# EAGLE board SummerCart64 (EAGLE 9.6.2)
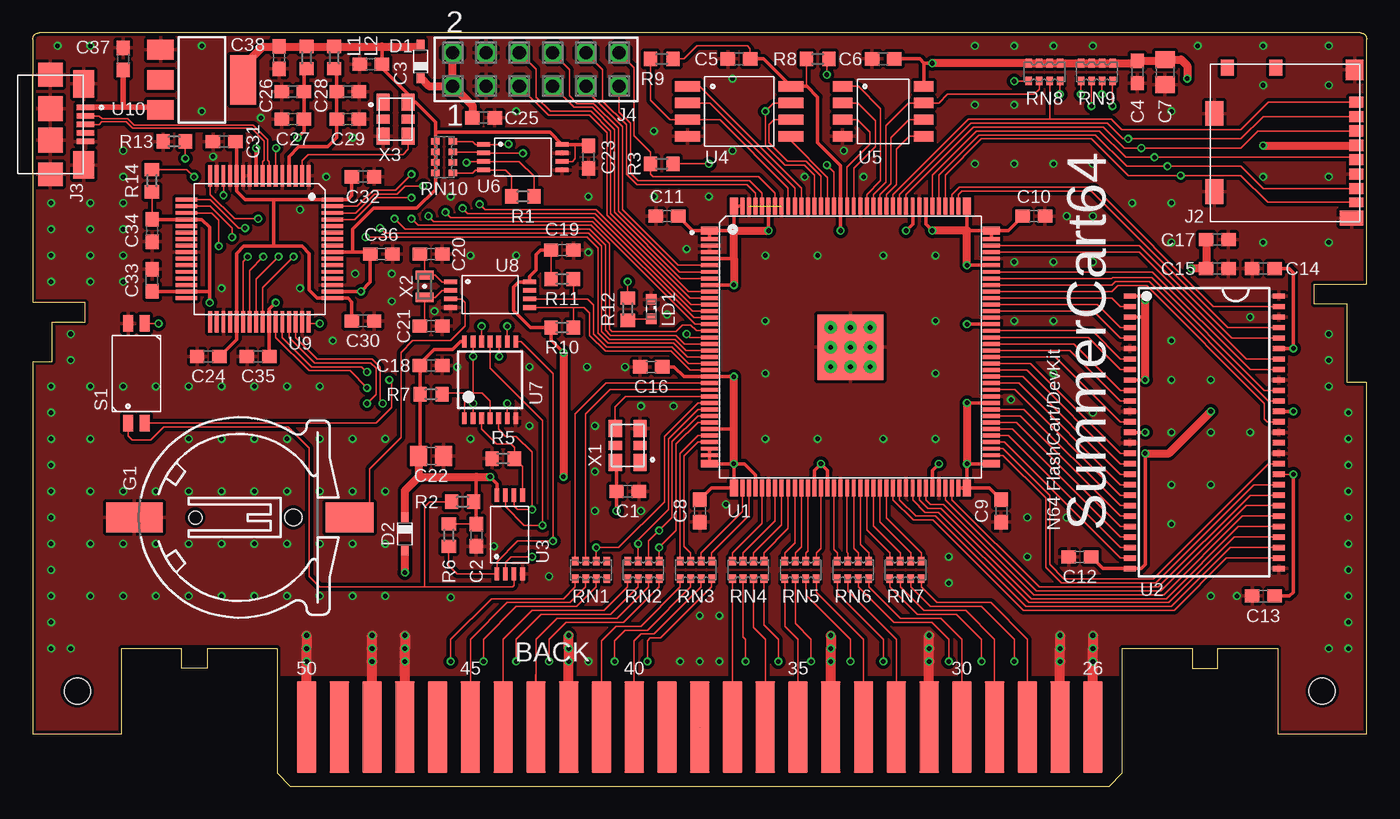
[diagram p0: board, top side]
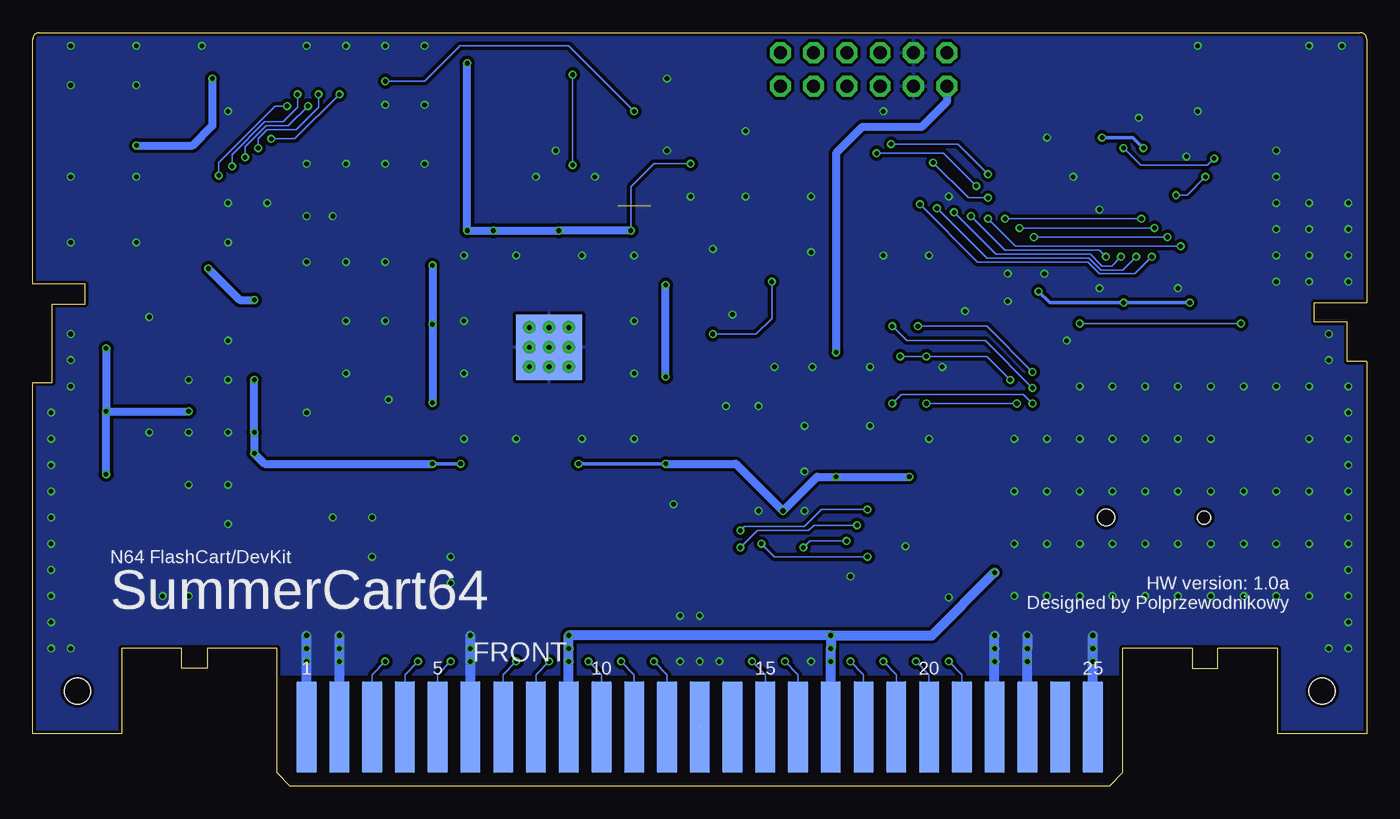
[diagram p1: board, bottom side, seen from below]

Size 101.8 x 57.5 mm. Coordinates in mm from the lower left corner, seen from the top.
Outline: 101.8,38.3 101.8,57 arc90 101.3,57.5 0.5,57.5 arc90 0,57 0,36.9 4,36.9 4,35.4 1.5,35.4 1.5,32.4 0,32.4 0,4 6.8,4 6.8,10.5 11.35,10.5 11.35,9 13.3,9 13.3,10.5 18.65,10.5 18.65,1 19.65,0 82.15,0 83.15,1 83.15,10.5 88.5,10.5 88.5,9 90.45,9 90.45,10.5 95,10.5 95,4 101.8,4 101.8,30.8 100.3,30.8 100.3,36.8 97.8,36.8 97.8,38.3 101.8,38.3
Copper layers (1*16): Top 0.035mm / dielectric 1.13mm / Bottom 0.035mm
Design rules "default *": minimum track width 5mil, minimum drill 0.2mm, track to track 5mil, track to pad 0.2mm, pad to pad 0.13mm, via to via 0.54mm, smd to smd 0.13mm, copper to edge 0.2mm, drill to drill 0.54mm, minimum pad ring 0.3mm, minimum via ring 0.13mm, stop-mask expansion 0.05mm, vias tented up to drill 14mil, thermal gap 10mil
Holes 2 mm at 3.4,7.25 98.4,7.25
tKeepout: area 18.6,8.5 to 83.2,12.5; area 13.3,10.5 to 18.6,12.5; area 83.2,10.5 to 88.5,12.5
bKeepout: area 18.6,8.5 to 83.2,12.5; area 13.3,10.5 to 18.6,12.5; area 83.2,10.5 to 88.5,12.5
tRestrict: area 11.4,9 to 13.3,10.5; area 88.5,9 to 90.4,10.5
bRestrict: area 11.4,9 to 13.3,10.5; area 88.5,9 to 90.4,10.5

## Footprints (pad centres in the part's own frame; a part is rotated, then mirrored left to right if it is on the bottom)
C0603 = smd 1.1 x 1: 1 -0.85,0; 2 0.85,0
C0805 = smd 1.3 x 1.5: 1 -0.95,0; 2 0.95,0
SOD323_ST = smd 0.8 x 0.6: A 1.25,0; C -1.25,0
CH291-1220LF = smd 2.3 x 3.66: + 0,-2.296 | smd 2.3 x 4.3: - 0,14.146 | hole 1.3: 0,2 | hole 1: 0,9.5
N64_EDGE = smd 1.5 x 7 bottom: 1 30,-6; 2 27.5,-6; 3 25,-6; 4 22.5,-6; 5 20,-6; 6 17.5,-6; 7 15,-6; 8 12.5,-6; 9 10,-6; 10 7.5,-6; 11 5,-6; 12 2.5,-6; 13 0,-6; 14 -2.5,-6; 15 -5,-6; 16 -7.5,-6; 17 -10,-6; 18 -12.5,-6; 19 -15,-6; 20 -17.5,-6; 21 -20,-6; 22 -22.5,-6; 23 -25,-6; 24 -27.5,-6; 25 -30,-6 | smd 1.5 x 7: 26 30,-6; 27 27.5,-6; 28 25,-6; 29 22.5,-6; 30 20,-6; 31 17.5,-6; 32 15,-6; 33 12.5,-6; 34 10,-6; 35 7.5,-6; 36 5,-6; 37 2.5,-6; 38 0,-6; 39 -2.5,-6; 40 -5,-6; 41 -7.5,-6; 42 -10,-6; 43 -12.5,-6; 44 -15,-6; 45 -17.5,-6; 46 -20,-6; 47 -22.5,-6; 48 -25,-6; 49 -27.5,-6; 50 -30,-6
MICRO_SD = smd 0.85 x 1.1: 1 3.105,0.25; 2 2.005,0.25; 3 0.905,0.25; 4 -0.195,0.25; 5 -1.295,0.25; 6 -2.395,0.25; 7 -3.495,0.25 | smd 0.75 x 1.1: 8 -4.545,0.25 | smd 1.2 x 1: CD1 5.74,6.4; CD2 5.74,10.1 | smd 1.55 x 1.35: G1 5.565,0.375 | smd 1.17 x 1.8: G2 -5.755,0.6 | smd 1.9 x 1.35: G3 -3.73,11.075; G4 2.24,11.075
MICRO_USB = smd 0.4 x 1.35: 1 -1.3,2.675; 2 -0.65,2.675; 3 0,2.675; 4 0.65,2.675; 5 1.3,2.675 | smd 2.1 x 1.6: GND1 -3.1,2.55; GND2 3.1,2.55 | smd 1.8 x 1.9: GND3 -3.8,0; GND6 3.8,0 | smd 1.9 x 1.9: GND4 -1.2,0; GND5 1.2,0
SSW-106-02-G-D = drill 1 pad 1.5 octagon: 1 -6.35,-1.27; 2 -6.35,1.27; 3 -3.81,-1.27; 4 -3.81,1.27; 5 -1.27,-1.27; 6 -1.27,1.27; 7 1.27,-1.27; 8 1.27,1.27; 9 3.81,-1.27; 10 3.81,1.27; 11 6.35,-1.27; 12 6.35,1.27
R0603 = smd 1 x 1.1: 1 -0.85,0; 2 0.85,0
SML0603 = smd 0.8 x 0.8: A 0.75,0; C -0.75,0
CAY16 = smd 0.5 x 0.65: 1 -1.2,-0.675; 2 -0.4,-0.675; 3 0.4,-0.675; 4 1.2,-0.675; 5 1.2,0.675; 6 0.4,0.675; 7 -0.4,0.675; 8 -1.2,0.675
218-2 = smd 0.762 x 1.27: 1 -0.635,-3.81; 2 0.635,-3.81; 3 0.635,3.81; 4 -0.635,3.81
EQFP144 = smd 1.3 x 0.6: 1 -10.75,8.9; 36 -10.75,-8.9; 73 10.75,-8.9; 108 10.75,8.9 | smd 1.3 x 0.3: 2 -10.75,8.25; 3 -10.75,7.75; 4 -10.75,7.25; 5 -10.75,6.75; 6 -10.75,6.25; 7 -10.75,5.75; 8 -10.75,5.25; 9 -10.75,4.75; 10 -10.75,4.25; 11 -10.75,3.75; 12 -10.75,3.25; 13 -10.75,2.75; 14 -10.75,2.25; 15 -10.75,1.75; 16 -10.75,1.25; 17 -10.75,0.75; 18 -10.75,0.25; 19 -10.75,-0.25; 20 -10.75,-0.75; 21 -10.75,-1.25; 22 -10.75,-1.75; 23 -10.75,-2.25; 24 -10.75,-2.75; 25 -10.75,-3.25; 26 -10.75,-3.75; 27 -10.75,-4.25; 28 -10.75,-4.75; 29 -10.75,-5.25; 30 -10.75,-5.75; 31 -10.75,-6.25; 32 -10.75,-6.75; 33 -10.75,-7.25; 34 -10.75,-7.75; 35 -10.75,-8.25; 74 10.75,-8.25; 75 10.75,-7.75; 76 10.75,-7.25; 77 10.75,-6.75; 78 10.75,-6.25; 79 10.75,-5.75; 80 10.75,-5.25; 81 10.75,-4.75; 82 10.75,-4.25; 83 10.75,-3.75; 84 10.75,-3.25; 85 10.75,-2.75; 86 10.75,-2.25; 87 10.75,-1.75; 88 10.75,-1.25; 89 10.75,-0.75; 90 10.75,-0.25; 91 10.75,0.25; 92 10.75,0.75; 93 10.75,1.25; 94 10.75,1.75; 95 10.75,2.25; 96 10.75,2.75; 97 10.75,3.25; 98 10.75,3.75; 99 10.75,4.25; 100 10.75,4.75; 101 10.75,5.25; 102 10.75,5.75; 103 10.75,6.25; 104 10.75,6.75; 105 10.75,7.25; 106 10.75,7.75; 107 10.75,8.25 | smd 0.6 x 1.3: 37 -8.9,-10.75; 72 8.9,-10.75; 109 8.9,10.75; 144 -8.9,10.75 | smd 0.3 x 1.3: 38 -8.25,-10.75; 39 -7.75,-10.75; 40 -7.25,-10.75; 41 -6.75,-10.75; 42 -6.25,-10.75; 43 -5.75,-10.75; 44 -5.25,-10.75; 45 -4.75,-10.75; 46 -4.25,-10.75; 47 -3.75,-10.75; 48 -3.25,-10.75; 49 -2.75,-10.75; 50 -2.25,-10.75; 51 -1.75,-10.75; 52 -1.25,-10.75; 53 -0.75,-10.75; 54 -0.25,-10.75; 55 0.25,-10.75; 56 0.75,-10.75; 57 1.25,-10.75; 58 1.75,-10.75; 59 2.25,-10.75; 60 2.75,-10.75; 61 3.25,-10.75; 62 3.75,-10.75; 63 4.25,-10.75; 64 4.75,-10.75; 65 5.25,-10.75; 66 5.75,-10.75; 67 6.25,-10.75; 68 6.75,-10.75; 69 7.25,-10.75; 70 7.75,-10.75; 71 8.25,-10.75; 110 8.25,10.75; 111 7.75,10.75; 112 7.25,10.75; 113 6.75,10.75; 114 6.25,10.75; 115 5.75,10.75; 116 5.25,10.75; 117 4.75,10.75; 118 4.25,10.75; 119 3.75,10.75; 120 3.25,10.75; 121 2.75,10.75; 122 2.25,10.75; 123 1.75,10.75; 124 1.25,10.75; 125 0.75,10.75; 126 0.25,10.75; 127 -0.25,10.75; 128 -0.75,10.75; 129 -1.25,10.75; 130 -1.75,10.75; 131 -2.25,10.75; 132 -2.75,10.75; 133 -3.25,10.75; 134 -3.75,10.75; 135 -4.25,10.75; 136 -4.75,10.75; 137 -5.25,10.75; 138 -5.75,10.75; 139 -6.25,10.75; 140 -6.75,10.75; 141 -7.25,10.75; 142 -7.75,10.75; 143 -8.25,10.75 | smd 5 x 5 bottom: CASE_B 0,0 | smd 5 x 5: CASE_T 0,0 | drill 0.35: P$1 -1.5,1.5; P$2 0,1.5; P$3 1.5,1.5; P$4 -1.5,-1.5; P$5 0,-1.5; P$6 1.5,-1.5; P$7 -1.5,0; P$8 0,0; P$9 1.5,0
TSOP54-400 = smd 0.4 x 0.9: 1 -10.4,-5.68; 2 -9.6,-5.68; 3 -8.8,-5.68; 4 -8,-5.68; 5 -7.2,-5.68; 6 -6.4,-5.68; 7 -5.6,-5.68; 8 -4.8,-5.68; 9 -4,-5.68; 10 -3.2,-5.68; 11 -2.4,-5.68; 12 -1.6,-5.68; 13 -0.8,-5.68; 14 0,-5.68; 15 0.8,-5.68; 16 1.6,-5.68; 17 2.4,-5.68; 18 3.2,-5.68; 19 4,-5.68; 20 4.8,-5.68; 21 5.6,-5.68; 22 6.4,-5.68; 23 7.2,-5.68; 24 8,-5.68; 25 8.8,-5.68; 26 9.6,-5.68; 27 10.4,-5.68; 28 10.4,5.68; 29 9.6,5.68; 30 8.8,5.68; 31 8,5.68; 32 7.2,5.68; 33 6.4,5.68; 34 5.6,5.68; 35 4.8,5.68; 36 4,5.68; 37 3.2,5.68; 38 2.4,5.68; 39 1.6,5.68; 40 0.8,5.68; 41 0,5.68; 42 -0.8,5.68; 43 -1.6,5.68; 44 -2.4,5.68; 45 -3.2,5.68; 46 -4,5.68; 47 -4.8,5.68; 48 -5.6,5.68; 49 -6.4,5.68; 50 -7.2,5.68; 51 -8,5.68; 52 -8.8,5.68; 53 -9.6,5.68; 54 -10.4,5.68
TSSOP8 = smd 0.35 x 1: 1 -0.975,-3; 2 -0.325,-3; 3 0.325,-3; 4 0.975,-3; 5 0.975,3; 6 0.325,3; 7 -0.325,3; 8 -0.975,3
SO8_208MIL = smd 0.8 x 1.9: 1 -1.905,-3.95; 2 -0.635,-3.95; 3 0.635,-3.95; 4 1.905,-3.95; 5 1.905,3.95; 6 0.635,3.95; 7 -0.635,3.95; 8 -1.905,3.95
SO8_150MIL = smd 0.8 x 1.5: 1 -1.905,-3.1; 2 -0.635,-3.1; 3 0.635,-3.1; 4 1.905,-3.1; 5 1.905,3.1; 6 0.635,3.1; 7 -0.635,3.1; 8 -1.905,3.1
TSSOP14 = smd 0.35 x 0.9: 1 -1.95,-2.925; 2 -1.3,-2.925; 3 -0.65,-2.925; 4 0,-2.925; 5 0.65,-2.925; 6 1.3,-2.925; 7 1.95,-2.925; 8 1.95,2.925; 9 1.3,2.925; 10 0.65,2.925; 11 0,2.925; 12 -0.65,2.925; 13 -1.3,2.925; 14 -1.95,2.925
LQFP64 = smd 1.65 x 0.3: 1 -5.575,3.75; 2 -5.575,3.25; 3 -5.575,2.75; 4 -5.575,2.25; 5 -5.575,1.75; 6 -5.575,1.25; 7 -5.575,0.75; 8 -5.575,0.25; 9 -5.575,-0.25; 10 -5.575,-0.75; 11 -5.575,-1.25; 12 -5.575,-1.75; 13 -5.575,-2.25; 14 -5.575,-2.75; 15 -5.575,-3.25; 16 -5.575,-3.75; 33 5.575,-3.75; 34 5.575,-3.25; 35 5.575,-2.75; 36 5.575,-2.25; 37 5.575,-1.75; 38 5.575,-1.25; 39 5.575,-0.75; 40 5.575,-0.25; 41 5.575,0.25; 42 5.575,0.75; 43 5.575,1.25; 44 5.575,1.75; 45 5.575,2.25; 46 5.575,2.75; 47 5.575,3.25; 48 5.575,3.75 | smd 0.3 x 1.65: 17 -3.75,-5.575; 18 -3.25,-5.575; 19 -2.75,-5.575; 20 -2.25,-5.575; 21 -1.75,-5.575; 22 -1.25,-5.575; 23 -0.75,-5.575; 24 -0.25,-5.575; 25 0.25,-5.575; 26 0.75,-5.575; 27 1.25,-5.575; 28 1.75,-5.575; 29 2.25,-5.575; 30 2.75,-5.575; 31 3.25,-5.575; 32 3.75,-5.575; 49 3.75,5.575; 50 3.25,5.575; 51 2.75,5.575; 52 2.25,5.575; 53 1.75,5.575; 54 1.25,5.575; 55 0.75,5.575; 56 0.25,5.575; 57 -0.25,5.575; 58 -0.75,5.575; 59 -1.25,5.575; 60 -1.75,5.575; 61 -2.25,5.575; 62 -2.75,5.575; 63 -3.25,5.575; 64 -3.75,5.575
SOT223 = smd 1.5 x 2: 1 -2.3,-3.15; 2 0,-3.15; 3 2.3,-3.15 | smd 3.8 x 2: 4 0,3.15
3.2X2.5_OSCILLATOR = smd 1.3 x 1: 1 -1.3,-0.95; 3 1.3,-0.95; 4 1.3,0.95; 6 -1.3,0.95 | smd 0.7 x 1: 2 0,-0.95; 5 0,0.95
FC-12M = smd 0.7 x 1.4: 1 -0.85,0; 2 0.85,0

## Placement (x,y rotation side)
C1  10n  [C0603]  45.4,22.5 0 top
C2  100n  [C0603]  33.85,19.15 270 top
C3  100n  [C0603]  25.8,55.1 180 top
C4  100n  [C0603]  84.3,54.5 270 top
C5  100n  [C0603]  53.9,55.5 180 top
C6  100n  [C0603]  64.9,55.5 180 top
C7  47u  [C0805]  86.4,54.5 270 top
C8  100n  [C0603]  50.9,21 270 top
C9  100n  [C0603]  73.9,21 270 top
C10  100n  [C0603]  76.4,43.5 0 top
C11  100n  [C0603]  48.4,43.5 180 top
C12  100n  [C0603]  79.9,17.5 180 top
C13  100n  [C0603]  93.9,14.5 180 top
C14  100n  [C0603]  93.9,39.5 180 top
C15  100n  [C0603]  90.4,39.5 0 top
C16  4.7u  [C0603]  47.2,32 180 top
C17  4.7u  [C0603]  90.4,41.7 0 top
C18  100n  [C0603]  30.4,32.1 0 top
C19  100n  [C0603]  40.4,40.9 0 top
C20  9p  [C0603]  30.4,40.6 0 top
C21  9p  [C0603]  30.4,35.1 0 top
C22  47u  [C0805]  30.4,25.2 0 top
C23  10n  [C0603]  42.4,48 270 top
C24  3.3u  [C0603]  13.4,32.8 180 top
C25  100n  [C0603]  34.4,51 0 top
C26  4.7u  [C0603]  19.85,53 180 top
C27  100n  [C0603]  19.85,50.9 180 top
C28  4.7u  [C0603]  24.05,53 0 top
C29  100n  [C0603]  24.05,50.9 0 top
C30  100n  [C0603]  25.2,35.5 0 top
C31  100n  [C0603]  14.6,49.2 180 top
C32  100n  [C0603]  25.2,46.5 0 top
C33  100n  [C0603]  9.1,38.6 90 top
C34  100n  [C0603]  9.1,42.4 270 top
C35  100n  [C0603]  17.2,32.8 180 top
C36  100n  [C0603]  26.6,40.6 0 top
C37  4.7u  [C0603]  6.9,55.5 270 top
C38  4.7u  [C0603]  18.8,55.6 90 top
D1  BAT60AE6327HTSA1  [SOD323_ST]  29.6,55.3 90 top
D2  BAT60AE6327HTSA1  [SOD323_ST]  28.4,19.25 270 top
G1  CH291-1220LF  [CH291-1220LF]  21.9,20.5 90 top
J1  N64_EDGE  [N64_EDGE]  50.9,10.5 0 top
J2  molex 104031-0811  [MICRO_SD]  101.25,49.1 90 top
J3  10118192-0002LF  [MICRO_USB]  1.35,50.5 270 top
J4  SSW-106-02-G-D  [SSW-106-02-G-D]  38.4,54.7 0 top
L1  MI0603K300R-10  [R0603]  20.9,55.6 90 top
L2  MI0603K300R-10  [R0603]  23,55.6 90 top
LD1  150060RS75000  [SML0603]  47.2,36.4 270 top
R1  2.2K  [R0603]  37.4,45 0 top
R2  10K  [R0603]  32.8,21.7 0 top
R3  10K  [R0603]  48,47.5 0 top
R5  10K  [R0603]  35.9,25 0 top
R6  10K  [R0603]  31.75,19.15 90 top
R7  10K  [R0603]  30.4,29.9 180 top
R8  10K  [R0603]  59.9,55.5 180 top
R9  10k  [R0603]  48,55.5 0 top
R10  2.2k  [R0603]  40.4,35 180 top
R11  2.2k  [R0603]  40.4,38.7 180 top
R12  1k  [R0603]  45.4,36.4 90 top
R13  12k  [R0603]  10.8,49.2 180 top
R14  1k  [R0603]  9.1,46.2 270 top
RN1  47R  [CAY16]  42.6,16.5 0 top
RN2  47R  [CAY16]  46.6,16.5 0 top
RN3  47R  [CAY16]  50.6,16.5 0 top
RN4  47R  [CAY16]  54.6,16.5 0 top
RN5  47R  [CAY16]  58.6,16.5 0 top
RN6  47R  [CAY16]  62.6,16.5 0 top
RN7  47R  [CAY16]  66.6,16.5 0 top
RN8  20k  [CAY16]  77.2,54.5 0 top
RN9  20k  [CAY16]  81.2,54.5 0 top
RN10  20k  [CAY16]  31.4,48 90 top
S1  218-2LPSTRF  [218-2]  7.9,31.5 0 top
U1  10M08SCE144C8G  [EQFP144]  62.4,33.5 0 top
U2  IS42S16320F-7TL  [TSOP54-400]  89.4,27 270 top
U3  ATTINY45-20XU  [TSSOP8]  36.4,19.2 0 top
U4  W25Q128JVSIM  [SO8_208MIL]  53.9,51.5 270 top
U5  IS62WVS2568GBLL-45NLI  [SO8_150MIL]  64.9,51.5 270 top
U6  AT93C66B-XHM  [TSSOP8]  37.4,48 270 top
U7  SN74LVC125APWR  [TSSOP14]  34.9,31 0 top
U8  MCP7940NT-I/ST  [TSSOP8]  34.9,37.5 270 top
U9  FT2232HL  [LQFP64]  17.3,41 270 top
U10  AZ1117IH-3.3TRG1  [SOT223]  12.9,53.9 270 top
X1  XLH336050.000000I  [3.2X2.5_OSCILLATOR]  45.4,26 90 top
X2  FC-12M 32.7680KA-AC3  [FC-12M]  29.9,38.15 90 top
X3  XLH336012.000000X  [3.2X2.5_OSCILLATOR]  27.7,50.9 270 top

## Library data of the parts
C1-C38 = rcl; SPICEPREFIX: C
D1 D2 = diode
G1 = battery
J1-J3 S1 U1 U3-U6 U8 U9 X1 X3 = SummerCart64
J4 = con-samtec; MF: Samtec Inc.; MPN: SSW-106-02-G-D; OC_FARNELL: unknown; OC_NEWARK: 11P9414
L1 L2 R1-R3 R5-R14 = rcl; SPICEPREFIX: R
LD1 = led
RN1-RN10 = resistor-dil; OC_FARNELL: unknown; OC_NEWARK: unknown
U2 = memory-micron; OC_FARNELL: unknown; OC_NEWARK: unknown
U7 = 74xx-eu
U10 = v-reg
X2 = crystal

## Nets
+1.8V_USB: C24.1 C30.1 C31.1 C32.1 U9.12 U9.37 U9.49 U9.64
+3V3: C1.1 C2.1 C4.1 C5.1 C6.1 C7.1 C8.1 C9.1 C10.1 C11.1 C12.1 C13.1 C14.1 C15.1 C16.1 C17.1 C18.1 C19.1 C22.1 C25.1 D1.C D2.C J2.4 J4.1 J4.2 R2.2 R3.2 R6.2 R7.2 R8.2 R9.2 R10.2 R11.2 RN8.5 RN8.6 RN8.7 RN8.8 RN9.5 RN9.6 RN9.7 RN9.8 U1.1 U1.2 U1.5 U1.9 U1.23 U1.31 U1.34 U1.35 U1.36 U1.37 U1.40 U1.49 U1.51 U1.67 U1.71 U1.72 U1.73 U1.82 U1.94 U1.103 U1.107 U1.108 U1.109 U1.115 U1.117 U1.128 U1.139 U1.143 U1.144 U2.1 U2.3 U2.9 U2.14 U2.27 U2.37 U2.43 U2.49 U3.8 U4.8 U5.8 U7.14 U8.8 X1.6
+3V3_N64: D2.A J1.9 J1.17 J1.34 J1.42
+3V3_USB: C3.1 C23.1 C33.1 C34.1 C35.1 C36.1 C38.2 D1.A L1.2 L2.2 R14.2 RN10.5 RN10.6 RN10.7 RN10.8 U6.6 U6.8 U9.20 U9.31 U9.42 U9.50 U9.56 U10.4 X3.6
+5V_USB: C37.2 J3.1 U10.3
+12V_N64: J1.13 J1.38
/CAS: U1.87 U2.17
/CS_SDRAM: U1.85 U2.19
/FLASH_CS: U1.134 U4.1
/FTDI_AVR_ENABLE: R7.1 S1.2 U7.1 U7.4 U7.10 U7.13
/FTDI_AVR_RESET: U7.9 U9.43
/FTDI_CS: U1.15 U9.41
/NCONFIG: R8.1 U1.129
/NMI: RN1.7 U1.25
/NMI_C: J1.45 RN1.2
/RAS: U1.86 U2.18
/READ: RN5.7 U1.47
/READ_C: J1.10 RN5.2
/RESET: R6.1 RN1.6 U1.27 U3.1 U7.8
/RESET_C: J1.20 RN1.3
/SRAM_CS: U1.124 U5.1
/WE: U1.88 U2.16
/WRITE: RN5.6 U1.48
/WRITE_C: J1.8 RN5.3
A0: U1.79 U2.23
A1: U1.78 U2.24
A2: U1.77 U2.25
A3: U1.76 U2.26
A4: U1.61 U2.29
A5: U1.62 U2.30
A6: U1.64 U2.31
A7: U1.65 U2.32
A8: U1.66 U2.33
A9: U1.69 U2.34
A10: U1.80 U2.22
A11: U1.70 U2.35
A12: U1.74 U2.36
AD0: RN7.5 U1.60
AD0_C: J1.28 RN7.4
AD1: RN7.7 U1.58
AD1_C: J1.29 RN7.2
AD2: RN6.5 U1.56
AD2_C: J1.30 RN6.4
AD3: RN6.7 U1.54
AD3_C: J1.32 RN6.2
AD4: RN4.6 U1.44
AD4_C: J1.36 RN4.3
AD5: RN4.8 U1.41
AD5_C: J1.37 RN4.1
AD6: RN3.6 U1.38
AD6_C: J1.40 RN3.3
AD7: RN3.8 U1.32
AD7_C: J1.41 RN3.1
AD8: RN3.7 U1.33
AD8_C: J1.16 RN3.2
AD9: RN3.5 U1.39
AD9_C: J1.15 RN3.4
AD10: RN4.7 U1.43
AD10_C: J1.12 RN4.2
AD11: RN4.5 U1.45
AD11_C: J1.11 RN4.4
AD12: RN6.8 U1.52
AD12_C: J1.7 RN6.1
AD13: RN6.6 U1.55
AD13_C: J1.5 RN6.3
AD14: RN7.8 U1.57
AD14_C: J1.4 RN7.1
AD15: RN7.6 U1.59
AD15_C: J1.3 RN7.3
ALEH: RN5.8 U1.46
ALEH_C: J1.35 RN5.1
ALEL: RN5.5 U1.50
ALEL_C: J1.33 RN5.4
AVR_MOSI: R5.2 U3.5 U7.3
BA0: U1.84 U2.20
BA1: U1.81 U2.21
CIC_DATA_CLK: RN2.6 U1.29 U3.6 U7.5
CIC_DATA_CLK_C: J1.43 RN2.3
CIC_DATA_IO: RN2.5 U1.30 U3.7 U7.11
CIC_DATA_IO_C: J1.18 RN2.4
CIC_SWITCH: R2.1 S1.1 U3.3
CLK_FPGA: U1.26 X1.4
CLK_FTDI: U9.2 X3.4
CLK_SDRAM: U1.75 U2.38
D_N: J3.2 U9.7
D_P: J3.3 U9.8
DQ0: U1.98 U2.2
DQ1: U1.97 U2.4
DQ2: U1.96 U2.5
DQ3: U1.93 U2.7
DQ4: U1.92 U2.8
DQ5: U1.91 U2.10
DQ6: U1.90 U2.11
DQ7: U1.89 U2.13
DQ8: U1.99 U2.42
DQ9: U1.100 U2.44
DQ10: U1.101 U2.45
DQ11: U1.102 U2.47
DQ12: U1.105 U2.48
DQ13: U1.106 U2.50
DQ14: U1.110 U2.51
DQ15: U1.111 U2.53
FLASH_CLK: U1.131 U4.6
FLASH_SIO0: U1.130 U4.5
FLASH_SIO1: U1.135 U4.2
FLASH_SIO2: R9.1 U1.136 U4.3
FLASH_SIO3: RN8.1 U1.132 U4.7
FPGA_TCK: U1.18 U9.16
FPGA_TDI: U1.19 U9.17
FPGA_TDO: U1.20 U9.18
FPGA_TMS: U1.16 U9.19
FTDI_AVR_MISO: U7.6 U9.45
FTDI_AVR_MOSI: U7.2 U9.46
FTDI_AVR_SCK: U7.12 U9.44
FTDI_EECLK: RN10.3 U6.2 U9.62
FTDI_EECS: RN10.4 U6.1 U9.63
FTDI_EEDATA: R1.2 U6.3 U9.61
FTDI_REF: R13.1 U9.6
FTDI_RESET: R14.1 U9.14
FTDI_SCK: U1.12 U9.38
FTDI_SI: U1.13 U9.39
FTDI_SO: U1.14 U9.40
FTDI_VPHY: C28.1 C29.1 L2.1 U9.4
FTDI_VPLL: C26.1 C27.1 L1.1 U9.9
GND: C1.2 C2.2 C3.2 C4.2 C5.2 C6.2 C7.2 C8.2 C9.2 C10.2 C11.2 C12.2 C13.2 C14.2 C15.2 C16.2 C17.2 C18.2 C19.2 C20.2 C21.2 C22.2 C23.2 C24.2 C25.2 C26.2 C27.2 C28.2 C29.2 C30.2 C31.2 C32.2 C33.2 C34.2 C35.2 C36.2 C37.1 C38.1 G1.- J1.1 J1.2 J1.6 J1.22 J1.23 J1.25 J1.26 J1.27 J1.31 J1.47 J1.48 J1.50 J2.6 J2.G1 J2.G2 J2.G3 J2.G4 J3.5 J3.GND1 J3.GND2 J3.GND3 J3.GND4 J3.GND5 J3.GND6 J4.3 J4.4 LD1.C R5.1 R13.2 S1.4 U1.3 U1.4 U1.42 U1.53 U1.63 U1.68 U1.83 U1.95 U1.104 U1.116 U1.125 U1.133 U1.137 U1.142 U1.CASE_B U1.CASE_T U2.6 U2.12 U2.15 U2.28 U2.39 U2.41 U2.46 U2.52 U2.54 U3.4 U4.4 U5.4 U6.5 U6.7 U7.7 U8.4 U9.1 U9.5 U9.10 U9.11 U9.13 U9.15 U9.25 U9.35 U9.47 U9.51 U10.1 X1.3 X3.3
JTCK_C: J1.44 RN2.1
LED: R12.2 U1.17
N$2: S1.3 U9.48
N$4: LD1.A R12.1
N$16: R1.1 RN10.1 U6.4
PMOD_1: J4.12 R3.1 U1.138
PMOD_2: J4.11 U1.140
PMOD_3: J4.10 U1.141
PMOD_4: J4.9 U1.6
PMOD_5: J4.8 U1.7
PMOD_6: J4.7 U1.8
PMOD_7: J4.6 U1.10
PMOD_8: J4.5 U1.11
RTC_SCL: R11.1 U1.21 U8.6
RTC_SDA: R10.1 U1.22 U8.5
RTC_VBAT: G1.+ U8.3
RTC_X1: C20.1 U8.1 X2.2
RTC_X2: C21.1 U8.2 X2.1
SD_CLK: J2.5 RN9.2 U1.114
SD_CMD: J2.3 RN9.1 U1.118
SD_DAT0: J2.7 RN9.3 U1.113
SD_DAT1: J2.8 RN9.4 U1.112
SD_DAT2: J2.1 RN8.3 U1.120
SD_DAT3: J2.2 RN8.4 U1.119
SI_CLK: RN2.7 U1.28 U3.2
SI_CLK_C: J1.19 RN2.2
SI_DATA: RN1.8 U1.24
SI_DATA_C: J1.21 RN1.1
SRAM_CLK: U1.122 U5.6
SRAM_SIO0: U1.121 U5.5
SRAM_SIO1: U1.126 U5.2
SRAM_SIO2: U1.127 U5.3
SRAM_SIO3: RN8.2 U1.123 U5.7

## Tracks (layer width: path | path; a pad name or v marks a point on that pad's centre or on a via)
+1.8V_USB
  Top 0.254: C32.1 24.35,45.05 24.05,44.75 U9.64 18.4,44.75 | C30.1 24.35,36.95 24.05,37.25 U9.49 21.7,37.25 21.1,37.85 21.1,40.65 20.55,41.2 18.4,41.2 | C31.1 15.55,49.1 U9.12 15.55,45.4 16.2,44.75 18.4,44.75 | 18.4,41.2 16.1,41.2 15.55,40.65 U9.37 15.55,34.1 C24.1 | 18.4,44.75 18.4,41.2
+3V3  (via drill 0.35)
  Top 0.127: U2.37 v96.2,23.8 | R6.2 C2.1 | R8.2 59.05,53.45 59.09,53.41 | R9.2 49.7,55.5 50.7,56.5 54.55,56.5 54.75,56.3 C5.1 | R11.2 C19.1 | R2.2 33.85,21.7 | R3.2 v51.6,47.5
  Top 0.254: U1.34 U1.35 U1.36 v53.5,24.6 | U1.2 U1.1 | U1.143 U1.144 53.5,42.4 U1.1 | U1.71 U1.72 | X1.6 44.55,24.6 C1.1 v44.55,21 | 84.12,55.17 C4.1 | 86.3,55.35 C7.1 | U1.107 U1.108 | v69.15,24.6 68.65,24.1 U1.67 | U1.72 v71.3,24.6 U1.73 | U1.51 60.65,24.1 v60.15,24.6 59.65,24.1 U1.49 | U1.40 55.15,23.75 54.3,24.6 v53.5,24.6 | v53.5,24.6 U1.37 51.8,22.75 C8.1 | U1.103 v71.3,39.75 | U1.109 71.3,42.4 U1.108 | v61.65,42.4 U1.128 61.65,47.35 59.9,49.1 59.9,52.6 59.09,53.41 U4.8 55.75,55.5 C5.1 | U1.139 v56.15,42.4 | U1.31 53.5,27.25 | U2.1 84.6,37.4 v84.9,37.1 | U2.14 v84.9,27 | v84.9,25.4 84.9,16.9 84.6,16.6 U2.27 81.65,16.6 C12.1 | U2.43 v96.2,28.6 | U2.49 v96.2,33.4 96.2,39.2 95.9,39.5 C14.1 | U2.9 v84.9,31 | U2.3 84.9,35.8 | v68.65,42.4 68.15,42.9 U1.115 | U1.5 53.5,40.25 | U1.117 67.15,42.9 v66.65,42.4 | v53.5,38.25 U1.9 | v53.5,31.25 U1.23 49.7,31.25 48.95,32 C16.1 | U1.108 74.45,42.4 C10.1 | U1.1 50.35,42.4 C11.1 | U1.72 73,22.75 C9.1 | v96.2,23.8 96.2,14.8 95.9,14.5 C13.1 | U7.14 32.65,33.92 32.05,33.33 30.62,33.33 29.55,32.25 C18.1 R7.2 29.55,25.3 C22.1 | C2.1 33.85,21.7 33.85,23.6 | J2.4 | U1.82 v71.3,29.25 | U1.94 v71.3,35.25 | v68.65,55.17 68.03,55.17 | 68.03,55.17 67.7,55.5 C6.1 | U5.8 68,55.15 68.03,55.17 | v40.5,33.1 39.55,34.05 R10.2 38,35 36.7,36.3 36.7,38.1 37.08,38.48 U8.8 37.9,38.9 38.4,39.4 38.4,40.55 38.75,40.9 C19.1 | U3.8 35.42,23.07 v34.9,23.6
  Top 0.508: J4.1 32.07,53.43
  Top 0.61: 84.12,55.17 RN9.5 RN9.6 RN9.7 RN9.8 RN8.5 RN8.6 RN8.7 RN8.8 v68.65,55.17 | C4.1 86.3,55.35 | C7.1 87.65,55.45 88.1,55 v88.1,54 | v68.65,42.4 71.3,42.4 v71.3,39.75 | v53.5,24.6 53.5,27.25 v53.5,31.25 | v84.9,31 84.9,35.8 v84.9,37.1 | v56.15,42.4 53.5,42.4 53.5,40.25 v53.5,38.25 | v84.9,25.4 86.7,25.4 v89.9,28.6 | v88.4,39.5 C15.1 C17.1 | v93.9,48.9 J2.4 | v71.3,29.25 v71.3,24.6 | D2.C 28.4,22.55 29.45,23.6 | 29.45,23.6 33.85,23.6 v34.9,23.6 | J4.2 J4.1 30.22,53.43 D1.C | 32.07,53.43 33.55,51.95 C25.1 | v40.5,33.1 v40.5,23.6 | C22.1 29.45,23.6
  Bottom 0.127: v51.6,47.5 54.4,47.5 56.15,45.75 v56.15,42.4
  Bottom 0.254: v53.5,24.6 v60.15,24.6 | v69.15,24.6 v71.3,24.6
  Bottom 0.61: v88.1,54 88.1,50.4 89.6,48.9 v93.9,48.9 | v53.5,24.6 48.15,24.6 v44.55,21 41.95,23.6 v40.5,23.6 v34.9,23.6 | v84.9,31 v84.9,27 v84.9,25.4 84.1,24.6 v71.3,24.6 | v96.2,23.8 v96.2,28.6 | v96.2,33.4 v96.2,28.6 | v96.2,28.6 v89.9,28.6 | v53.5,31.25 v53.5,38.25 | v68.65,55.17 v68.65,42.4 v66.65,42.4 v61.65,42.4 v56.15,42.4 | v88.4,39.5 86,37.1 v84.9,37.1 | J4.1 32.05,52.23 33.95,50.33 38.47,50.33 40.5,48.3 v40.5,33.1 | v71.3,39.75 v71.3,35.25 v71.3,29.25
+3V3_N64  (via drill 0.35)
  Top 0.61: v28.4,16.3 D2.A
  Top 0.762: J1.42 v40.9,9.5 v40.9,10.5 v40.9,11.5 | J1.34 v60.9,9.5 v60.9,10.5 v60.9,11.5
  Bottom 0.762: J1.42 v40.9,9.5 v40.9,10.5 v40.9,11.5 | J1.34 v60.9,9.5 v60.9,10.5 v60.9,11.5 v40.9,11.5 | v40.9,11.5 33.2,11.5 v28.4,16.3
+3V3_USB  (via drill 0.35)
  Top 0.127: 41.4,48.98 41.4,47.9 41.17,47.67 U6.6 | R14.2 C34.1
  Top 0.254: 26.65,56.45 C3.1 26.65,54.8 28.65,52.8 X3.6 29.2,52.2 30.72,50.67 30.72,49.9 | U9.50 v25.05,37.75 25.75,38.45 C36.1 25.6,40.75 24.4,40.75 | v18.55,36.9 18.05,36.4 U9.42 C35.1 | U9.56 24.4,40.75 | 24.4,40.75 24.4,42.5 26,44.1 29.3,44.1 30.72,45.52 RN10.8 RN10.7 RN10.6 RN10.5 30.72,49.9 | C34.1 U9.20 12.9,43.25 13.5,42.65 v13.5,36.9 13.5,37.75 U9.31 C33.1 | 30.72,49.9 39.47,49.9 U6.8 41.4,48.98 42.27,48.98 C23.1
  Top 0.406: U10.4 16.05,54.95
  Top 0.61: 16.05,54.95 17.55,56.45 C38.2 L1.2 L2.2 26.65,56.45 29.5,56.45 D1.A
  Bottom 0.254: v13.5,36.9 v18.55,36.9 24.2,36.9 v25.05,37.75
+5V_USB
  Top 0.406: J3.1 6.9,51.8 | 6.9,51.8 9.55,51.8 U10.3 | C37.2 6.9,51.8
+12V_N64  (1 unrouted)
/CAS
  Top 0.127: U1.87 75.85,31.75 83,24.6 U2.17
/CS_SDRAM
  Top 0.127: U1.85 75.25,30.75 83,23 U2.19
/FLASH_CS
  Top 0.127: U4.1 50.89,53.41 58.65,45.65 U1.134
/FTDI_AVR_ENABLE  (via drill 0.35)
  Top 0.127: 33.6,30 34.3,30 34.9,29.4 U7.4 | U7.13 v33.6,32.8 33.6,30 | U7.10 35.55,33.95 35.6,33.9 v35.6,32.8 | R7.1 31.35,30 32.95,30 | 32.95,30 33.6,30 | U7.1 32.95,30 | v27.2,31 27.4,30.8 27.4,28.9 26.2,27.7 8.55,27.7 S1.2
  Bottom 0.127: v35.6,32.8 v33.6,32.8 29,32.8 v27.2,31
/FTDI_AVR_RESET  (via drill 0.35)
  Top 0.127: U9.43 18.55,34.25 21.1,31.7 24.2,31.7 v25.5,30.4 | v36.2,35.1 U7.9
  Bottom 0.127: v36.2,35.1 35.1,34 29.1,34 v25.5,30.4
/FTDI_CS  (via drill 0.35)
  Top 0.127: U1.15 50.55,35.25 42.7,43.1 30.6,43.1 v30.2,43.5 | v19.9,40.4 17.55,38.05 U9.41
  Bottom 0.127: v30.2,43.5 27.6,40.9 20.4,40.9 v19.9,40.4
/NCONFIG  (via drill 0.35)
  Top 0.127: U1.129 61.15,46.85 v60.6,47.4 | v60.6,54.3 60.6,55.35 R8.1
  Bottom 0.127: v60.6,47.4 v60.6,54.3
/NMI
  Top 0.127: U1.25 44.05,30.25 42.2,28.4 RN1.7
/NMI_C
  Top 0.127: J1.45 33.4,11.2 36.2,14 41,14 42.2,15.2 RN1.2
/RAS
  Top 0.127: U1.86 75.55,31.25 83,23.8 U2.18
/READ
  Top 0.127: U1.47 58.65,18.25 58.2,17.8 RN5.7
/READ_C  (via drill 0.35)
  Top 0.127: v59.4,9.5 59.4,11.2 58.2,12.4 RN5.2
  Bottom 0.127: J1.10 58.4,8.5 v59.4,9.5
/RESET  (via drill 0.35)
  Top 0.127: U1.27 50.75,29.25 48.2,26.7 48.2,21.7 44.7,18.2 v43,18.2 RN1.6 | U7.8 37.27,33.92 39.7,31.5 v39.7,18.7 37,18.7 35.42,17.12 U3.1 32.4,16.2 31.75,16.85 R6.1
  Bottom 0.127: v43,18.2 42.5,18.7 v39.7,18.7
/RESET_C  (via drill 0.35)
  Top 0.127: v34.4,9.5 34.4,11.2 36.9,13.7 41.5,13.7 43,15.2 RN1.3
  Bottom 0.127: J1.20 33.4,8.5 v34.4,9.5
/SRAM_CS
  Top 0.127: U1.124 63.65,45.15 64.7,46.2 64.7,51.7 62.99,53.41 U5.1
/WE
  Top 0.127: U1.88 76.15,32.25 83,25.4 U2.16
/WRITE
  Top 0.127: U1.48 59.15,17.95 59,17.8 RN5.6
/WRITE_C  (via drill 0.35)
  Top 0.127: v62.4,9.5 62.4,11.2 59,14.6 RN5.3
  Bottom 0.127: J1.8 63.4,8.5 v62.4,9.5
A0
  Top 0.127: U1.79 75.05,27.75 83,19.8 U2.23
A1
  Top 0.127: U1.78 74.75,27.25 83,19 U2.24
A2
  Top 0.127: U1.77 74.45,26.75 83,18.2 U2.25
A3
  Top 0.127: U2.26 83,17.4 74.15,26.25 U1.76
A4
  Top 0.127: U1.61 65.65,21.85 67.2,20.3 68.7,20.3 75.6,13.4 87.1,13.4 91.1,17.4 U2.29
A5
  Top 0.127: U1.62 66.15,21.85 67.4,20.6 68.9,20.6 75.8,13.7 86.9,13.7 91.4,18.2 U2.30
A6
  Top 0.127: U1.64 67.15,21.85 68.1,20.9 69.1,20.9 76,14 86.7,14 91.7,19 U2.31
A7
  Top 0.127: U1.65 67.65,21.85 68.3,21.2 69.3,21.2 76.2,14.3 86.5,14.3 92,19.8 U2.32
A8
  Top 0.127: U1.66 68.15,21.85 68.5,21.5 69.5,21.5 76.4,14.6 86.3,14.6 92.3,20.6 U2.33
A9
  Top 0.127: U1.69 69.65,21.85 76.6,14.9 86.1,14.9 92.6,21.4 U2.34
A10
  Top 0.127: U1.80 75.35,28.25 83,20.6 U2.22
A11
  Top 0.127: U2.35 92.9,22.2 85.9,15.2 76.8,15.2 70.15,21.85 U1.70
A12
  Top 0.127: U1.74 74.05,25.25 77.3,22 77.3,16.7 78.5,15.5 85.7,15.5 93.2,23 U2.36
AD0
  Top 0.127: U1.60 65.15,20.45 67.8,17.8 RN7.5
AD0_C
  Top 0.127: J1.28 75.9,11.2 73.1,14 69,14 67.8,15.2 RN7.4
AD1
  Top 0.127: U1.58 64.15,19.85 66.2,17.8 RN7.7
AD1_C
  Top 0.127: J1.29 73.4,11.2 71.2,13.4 68,13.4 66.2,15.2 RN7.2
AD2
  Top 0.127: U1.56 63.15,18.45 63.8,17.8 RN6.5
AD2_C
  Top 0.127: J1.30 70.9,11.2 69.3,12.8 66.2,12.8 63.8,15.2 RN6.4
AD3
  Top 0.127: U1.54 62.15,17.85 62.2,17.8 RN6.7
AD3_C
  Top 0.127: J1.32 65.9,11.2 62.2,14.9 RN6.2
AD4
  Top 0.127: U1.44 57.15,19.95 55,17.8 RN4.6
AD4_C
  Top 0.127: J1.36 55.9,11.2 55,12.1 RN4.3
AD5
  Top 0.127: U1.41 55.65,20.05 53.4,17.8 RN4.8
AD5_C
  Top 0.127: J1.37 RN4.1
AD6
  Top 0.127: U1.38 54.15,20.95 51,17.8 RN3.6
AD6_C
  Top 0.127: RN3.3 51,15.2 47.4,11.6 46.4,11.6 45.9,11.1 J1.40
AD7
  Top 0.127: U1.32 50.75,26.75 49.4,25.4 RN3.8
AD7_C
  Top 0.127: J1.41 43.4,11.1 44.5,12.2 46.4,12.2 49.4,15.2 RN3.1
AD8
  Top 0.127: U1.33 50.75,26.25 49.7,25.2 49.7,18.3 50.2,17.8 RN3.7
AD8_C  (via drill 0.35)
  Top 0.127: v44.4,9.5 44.4,11.1 45.2,11.9 46.9,11.9 50.2,15.2 RN3.2
  Bottom 0.127: J1.16 43.4,8.5 v44.4,9.5
AD9
  Top 0.127: U1.39 54.65,20.65 51.8,17.8 RN3.5
AD9_C  (via drill 0.35)
  Top 0.127: v46.9,9.5 46.9,11.1 47.1,11.3 47.9,11.3 51.8,15.2 RN3.4
  Bottom 0.127: v46.9,9.5 45.9,8.5 J1.15
AD10
  Top 0.127: U1.43 56.65,20.25 54.2,17.8 RN4.7
AD10_C  (via drill 0.35)
  Top 0.127: v54.4,9.5 54.4,11.2 54.2,11.4 RN4.2
  Bottom 0.127: v54.4,9.5 53.4,8.5 J1.12
AD11
  Top 0.127: U1.45 57.65,19.65 55.8,17.8 RN4.5
AD11_C  (via drill 0.35)
  Top 0.127: v56.9,9.5 56.9,11.2 55.8,12.3 RN4.4
  Bottom 0.127: v56.9,9.5 55.9,8.5 J1.11
AD12
  Top 0.127: U1.52 61.15,18.05 61.4,17.8 RN6.8
AD12_C  (via drill 0.35)
  Top 0.127: v64.9,9.5 64.9,11.2 61.4,14.7 RN6.1
  Bottom 0.127: J1.7 65.9,8.5 v64.9,9.5
AD13
  Top 0.127: U1.55 62.65,18.15 63,17.8 RN6.6
AD13_C  (via drill 0.35)
  Top 0.127: v69.9,9.5 69.9,11.2 68.6,12.5 65.7,12.5 63,15.2 RN6.3
  Bottom 0.127: J1.5 70.9,8.5 v69.9,9.5
AD14
  Top 0.127: U1.57 63.65,19.55 65.4,17.8 RN7.8
AD14_C  (via drill 0.35)
  Top 0.127: v72.4,9.5 72.4,11.2 70.5,13.1 67.5,13.1 65.4,15.2 RN7.1
  Bottom 0.127: J1.4 73.4,8.5 v72.4,9.5
AD15
  Top 0.127: U1.59 64.65,20.15 67,17.8 RN7.6
AD15_C  (via drill 0.35)
  Top 0.127: RN7.3 67,15.2 68.5,13.7 72.4,13.7 74.9,11.2 v74.9,9.5
  Bottom 0.127: J1.3 75.9,8.5 v74.9,9.5
ALEH
  Top 0.127: U1.46 58.15,18.55 57.4,17.8 RN5.8
ALEH_C
  Top 0.127: J1.35 58.4,11.2 57.4,12.2 RN5.1
ALEL
  Top 0.127: U1.50 60.15,18.15 59.8,17.8 RN5.5
ALEL_C
  Top 0.127: J1.33 63.4,11.2 59.8,14.8 RN5.4
AVR_MOSI
  Top 0.127: U3.5 37.38,24.38 R5.2 36.75,25.85 36.5,26.1 35.4,26.1 34.25,27.25 U7.3
BA0
  Top 0.127: U1.84 74.95,30.25 83,22.2 U2.20
BA1
  Top 0.127: U1.81 75.65,28.75 83,21.4 U2.21
CIC_DATA_CLK  (via drill 0.35)
  Top 0.127: U1.29 50.75,28.25 48.8,26.3 48.8,20.5 v47.8,19.5 47,18.7 RN2.6 | U3.6 36.72,21.38 37,21.1 v38.1,21.1 38.1,25.5 36.9,26.7 36.1,26.7 35.55,27.25 U7.5
  Bottom 0.127: v38.1,21.1 41.6,21.1 42.9,19.8 47.5,19.8 v47.8,19.5
CIC_DATA_CLK_C
  Top 0.127: 38.4,8.5 38.4,11.2 40,12.8 44.6,12.8 47,15.2 RN2.3
  Top 0.152: J1.43 38.4,8.5
CIC_DATA_IO  (via drill 0.35)
  Top 0.127: U1.30 50.75,27.75 49.1,26.1 49.1,19.5 v47.8,18.2 RN2.5 | U3.7 36.08,21.32 37.5,19.9 v38.9,19.9 38.9,27.9 34.9,31.9 U7.11
  Bottom 0.127: v38.9,19.9 42.2,19.9 42.6,19.5 46.5,19.5 v47.8,18.2
CIC_DATA_IO_C  (via drill 0.35)
  Top 0.127: v39.4,9.5 39.4,11.2 40.7,12.5 45.1,12.5 47.8,15.2 RN2.4
  Bottom 0.127: J1.18 38.4,8.5 v39.4,9.5
CIC_SWITCH
  Top 0.127: U3.3 36.72,15.32 36.6,15.2 29.9,15.2 | S1.1 7.27,26.73 7.6,26.4 9,26.4 10,27.4 19.5,27.4 21.1,25.8 21.1,16 21.9,15.2 29.9,15.2 | R2.1 30.3,21.7 29.9,21.3 29.9,15.2
CLK_FPGA
  Top 0.127: X1.4 44.45,28.95 45.25,29.75 U1.26
CLK_FTDI
  Top 0.127: U9.2 20.55,47.75 21,48.2 28.25,48.2 28.65,48.6 X3.4
CLK_SDRAM
  Top 0.127: U2.38 94.3,24.6 85.5,15.8 78.7,15.8 77.6,16.9 77.6,22.19 74.04,25.75 U1.75
D_N
  Top 0.127: U9.7 18.05,47.65 17.93,47.78 17.93,49.33 16.8,50.45 7.75,50.45 7.25,50.95 5.29,50.95 5.09,51.15 J3.2
D_P
  Top 0.127: U9.8 17.55,47.65 17.67,47.78 17.67,49.23 16.7,50.2 7.64,50.2 7.14,50.7 5.28,50.7 5.08,50.5 J3.3
DQ0
  Top 0.127: U2.2 83,36.6 82.35,37.25 U1.98
DQ1
  Top 0.127: U1.97 81.25,36.75 83,35 U2.4
DQ2
  Top 0.127: U1.96 80.95,36.25 83,34.2 U2.5
DQ3
  Top 0.127: U1.93 80.85,34.75 83,32.6 U2.7
DQ4
  Top 0.127: U1.92 80.55,34.25 83,31.8 U2.8
DQ5
  Top 0.127: U1.91 79.45,33.75 83,30.2 U2.10
DQ6
  Top 0.127: U1.90 79.15,33.25 83,29.4 U2.11
DQ7
  Top 0.127: U1.89 78.05,32.75 83,27.8 U2.13
DQ8
  Top 0.127: U1.99 82.35,37.75 82.8,38.2 85,38.2 94,29.2 94,28 94.2,27.8 U2.42
DQ9
  Top 0.127: U1.100 82.35,38.25 82.6,38.5 85.2,38.5 94.3,29.4 U2.44
DQ10
  Top 0.127: U2.45 94,30.2 85.4,38.8 82.4,38.8 82.35,38.75 U1.101
DQ11
  Top 0.127: U2.47 92.9,31.8 85.45,39.25 U1.102
DQ12
  Top 0.127: U1.105 84.45,40.75 92.6,32.6 U2.48
DQ13
  Top 0.127: U1.106 84.45,41.25 91.5,34.2 U2.50
DQ14
  Top 0.127: U1.110 70.65,45.15 70.9,45.4 80.8,45.4 91.2,35 U2.51
DQ15
  Top 0.127: U2.53 90.1,36.6 81,45.7 70.7,45.7 70.15,45.15 U1.111
FLASH_CLK
  Top 0.127: U4.6 56.56,50.87 56.2,50.5 56.2,49.1 57.6,47.7 59,47.7 60.15,46.55 U1.131
FLASH_SIO0
  Top 0.127: U1.130 60.65,46.45 57.85,49.25 U4.5
FLASH_SIO1
  Top 0.127: U4.2 51.66,52.13 58.15,45.65 U1.135
FLASH_SIO2
  Top 0.127: U1.136 57.65,45.65 52.43,50.87 U4.3 48.63,50.87 47.15,52.35 R9.1
FLASH_SIO3  (via drill 0.35)
  Top 0.127: U4.7 56.53,52.13 v55.9,51.5 55.9,48.9 57.4,47.4 58.9,47.4 59.65,46.65 U1.132 | v74.9,53.8 75.97,53.8 RN8.1
  Bottom 0.127: v74.9,53.8 71.9,53.8 69.2,56.5 60.9,56.5 v55.9,51.5
FPGA_TCK  (via drill 0.35)
  Top 0.127: U1.18 49.75,33.75 49.1,34.4 44.1,34.4 43.7,34.8 43.7,41.3 42.5,42.5 28.4,42.5 v27.6,43.3 | v17.2,43.3 15.4,43.3 13.55,45.15 U9.16
  Bottom 0.127: v27.6,43.3 v17.2,43.3
FPGA_TDI  (via drill 0.35)
  Top 0.127: U1.19 49.85,33.25 49,34.1 44,34.1 43.4,34.7 43.4,41.2 42.4,42.2 26.9,42.2 v26.5,42.6 | v16.2,42.6 15.7,42.6 13.55,44.75 U9.17
  Bottom 0.127: v26.5,42.6 v16.2,42.6
FPGA_TDO  (via drill 0.35)
  Top 0.127: U1.20 49.95,32.75 48.9,33.8 43.9,33.8 43.13,34.57 43.13,41.07 42.3,41.9 v25.4,41.9 | U9.18 13.55,44.25 15.2,42.6 v15.2,41.9
  Bottom 0.127: v25.4,41.9 v15.2,41.9
FPGA_TMS  (via drill 0.35)
  Top 0.127: U1.16 50.65,34.75 50.2,35.2 49.6,35.2 49.1,34.7 44.2,34.7 44,34.9 44,41.4 42.6,42.8 29.4,42.8 v28.9,43.3 | U9.19 13.65,43.75 14.2,43.2 v14.2,41.2
  Bottom 0.127: v28.9,43.3 26.8,41.2 v14.2,41.2
FTDI_AVR_MISO  (via drill 0.35)
  Top 0.127: U7.6 v36.2,29.2 | v25.5,29.2 26.2,29.9 26.2,31.9 25.8,32.3 21.5,32.3 19.55,34.25 U9.45
  Bottom 0.127: v36.2,29.2 35.5,29.9 26.2,29.9 v25.5,29.2
FTDI_AVR_MOSI  (via drill 0.35)
  Top 0.127: U7.2 v33.6,29.2 | U9.46 20.05,34.25 21.7,32.6 25.9,32.6 26.5,32 26.5,29.4 v26.7,29.2
  Bottom 0.127: v33.6,29.2 v26.7,29.2
FTDI_AVR_SCK  (via drill 0.35)
  Top 0.127: U9.44 19.05,34.25 21.3,32 25.1,32 v25.5,31.6 | v34.25,35.1 U7.12
  Bottom 0.127: v34.25,35.1 29,35.1 v25.5,31.6
FTDI_EECLK  (via drill 0.35)
  Top 0.127: U9.62 24.65,43.75 26.1,45.2 27.8,45.2 28.4,45.8 v29.8,45.8 | RN10.3 34.33,48.4 U6.2 34.42,48.3 v37.4,48.3
  Bottom 0.127: v29.8,45.8 32.3,48.3 v37.4,48.3
FTDI_EECS  (via drill 0.35)
  Top 0.127: U9.63 24.75,44.25 26,45.5 27.7,45.5 v28.9,46.7 | RN10.4 33.58,49.2 33.8,48.98 U6.1 36.27,48.98 v36.3,49
  Bottom 0.127: v28.9,46.7 31.2,49 v36.3,49
FTDI_EEDATA  (via drill 0.35)
  Top 0.127: v28.9,44.9 26.22,44.9 24.57,43.25 U9.61 | R1.2 38.25,46.55 37.12,47.67 U6.3 33.17,47.67 v33.1,47.6
  Bottom 0.127: v28.9,44.9 30.4,44.9 v33.1,47.6
FTDI_REF  (via drill 0.35)
  Top 0.127: U9.6 v18.55,48.69 v18.56,48.7 | v11.65,47.9 R13.1
  Bottom 0.127: v18.56,48.7 v18.55,48.7 17.25,47.4 12.15,47.4 v11.65,47.9
FTDI_RESET  (via drill 0.35)
  Top 0.127: U9.14 v14.55,45.1 | R14.1 11.75,47.05 v12.3,46.5
  Bottom 0.127: v14.55,45.1 13.7,45.1 v12.3,46.5
FTDI_SCK  (via drill 0.35)
  Top 0.127: U1.12 50.25,36.75 43,44 34.5,44 v34.1,44.4 | v16.4,40.4 16.05,40.05 U9.38
  Bottom 0.127: v34.1,44.4 29.7,40 21.3,40 20.4,39.1 17.7,39.1 v16.4,40.4
FTDI_SI  (via drill 0.35)
  Top 0.127: U1.13 50.35,36.25 42.9,43.7 33.2,43.7 v32.8,44.1 | v17.6,40.4 16.55,39.35 U9.39
  Bottom 0.127: v32.8,44.1 29,40.3 21.2,40.3 20.3,39.4 18.6,39.4 v17.6,40.4
FTDI_SO  (via drill 0.35)
  Top 0.127: U1.14 50.45,35.75 42.8,43.4 31.9,43.4 v31.5,43.8 | v18.75,40.4 17.05,38.7 U9.40
  Bottom 0.127: v31.5,43.8 28.3,40.6 21.1,40.6 20.2,39.7 19.45,39.7 v18.75,40.4
FTDI_VPHY
  Top 0.254: L2.1 23.2,54.55 C28.1 C29.1 23.2,49.5 22.5,48.8 20.3,48.8 19.55,48.05 U9.4
FTDI_VPLL  (via drill 0.35)
  Top 0.254: U9.9 v17.05,48.7 | L1.1 20.7,54.55 C26.1 C27.1 20.7,50 v20.2,49.5
  Bottom 0.254: v17.05,48.7 17.85,49.5 v20.2,49.5
GND  (via drill 0.35)  (1 unrouted)
  Top 0.762: J1.50 v20.9,9.5 v20.9,10.5 v20.9,11.5 | J1.48 v25.9,9.5 v25.9,10.5 v25.9,11.5 | J1.47 v28.4,9.5 v28.4,10.5 v28.4,11.5 | J1.27 v78.4,9.5 v78.4,10.5 v78.4,11.5 | J1.26 v80.9,9.5 v80.9,10.5 v80.9,11.5 | J1.31 v68.4,9.5 v68.4,10.5 v68.4,11.5
  Bottom 0.762: J1.50 v20.9,9.5 v20.9,10.5 v20.9,11.5 | J1.48 v25.9,9.5 v25.9,10.5 v25.9,11.5 | J1.47 v28.4,9.5 v28.4,10.5 v28.4,11.5 | J1.31 v68.4,9.5 v68.4,10.5 v68.4,11.5 | J1.27 v78.4,9.5 v78.4,10.5 v78.4,11.5 | J1.26 v80.9,9.5 v80.9,10.5 v80.9,11.5
  other vias: 50.9,9.5 49.4,9.5 52.4,9.5 98.9,10.5 100.4,10.5 100.4,12.5 100.4,14.5 100.4,16.5 100.4,18.5 100.4,20.5 100.4,22.5 100.4,24.5 100.4,26.5 100.4,28.5 98.9,30.5 98.9,32.5 98.9,34.5 2.9,10.5 1.4,10.5 1.4,12.5 1.4,14.5 1.4,16.5 1.4,18.5 1.4,20.5 1.4,22.5 1.4,24.5 1.4,26.5 1.4,28.5 1.4,30.5 2.9,32.5 2.9,34.5 63.4,46.5 74.9,35.5 74.9,40 46.4,29 46.4,21 42.9,27.5 52.4,13 50.9,13 80.9,28.5 77.9,31.5 77.9,35.5 77.9,40 80.9,40 98.9,46.5 93.9,46.5 61.9,48.5 86.9,51.5 93.9,53.5 98.9,53.5 98.9,41.5 93.9,41.5 86.9,41.5 83.9,44.5 71.9,47.5 74.9,47.5 77.9,47.5 80.9,47.5 71.9,52 74.9,52 75.9,20.5 75.9,17.5 52.9,21.5 42.4,9.5 80.9,43.5 86.9,34 86.9,31 86.9,27 86.9,23 86.9,20 89.9,23 89.9,31 55.9,26.5 59.9,26.5 64.9,26.5 68.9,26.5 68.9,40.5 64.9,40.5 59.9,40.5 55.9,40.5 69.9,17.5 39.4,16 78.9,20.5 37.9,27.5 58.9,46.5 47.4,50 89.9,27 92.9,27 91.9,14.5 55.9,31.5 68.9,31.5 55.9,35.5 68.9,35.5 86.9,44.5 71.9,56.5 74.9,56.5 77.9,56.5 80.9,56.5 93.9,56.5 98.9,56.5 88.9,56.5 78.9,43.5 69.9,15.5 42.9,24 49.9,41 51.6,45 32.4,32 33.4,26.5 35.2,18.3 42.9,21 48.9,29 45.2,32 74.65,29.5 53.4,54 42.4,40.75 27.4,39.1 47.4,45 27.4,37 4.4,18.5 4.4,22.5 9.4,22.5 9.4,18.5 92.9,35.8 21.9,22.5 24.4,22.5 24.4,18.5 21.9,18.5 37.9,32 26.9,26.5 26.9,22.5 24.4,26.5 21.9,26.5 26.9,18.5 53.4,48.5 48.4,36 36.9,40.5 36.9,51.5 12.9,56.5 12.9,51.5 4.4,56.5 1.9,56.5 30.65,36.25 22.4,46.5 24.4,49.5 1.4,44.5 1.4,42.5 1.4,38.5 1.4,40.5 33.4,40.5 13.75,48.05 24.6,39.1 31.9,45 42.4,45 42.3,32 31.9,14.4 6.9,40.5 22.9,34 20.4,38 17.4,51 6.9,38.5 6.9,42.5 6.9,44.5 11.9,30.5 14.4,18.5 14.4,30.5 16.9,30.5 19.4,30.5 11.9,26.5 11.9,18.5 14.4,26.5 16.9,26.5 19.4,26.5 24.4,14.5 21.9,14.5 26.9,14.5 19.4,14.5 16.9,14.5 14.4,14.5 11.9,14.5 6.9,14.5 9.4,14.5 4.4,14.5 4.4,26.5 6.9,46.5 11.9,22.5 14.4,22.5 16.9,22.5 19.4,22.5 19.4,18.5 16.9,18.5 6.9,18.5 6.9,22.5 14.4,38 20.4,44 9.4,30.5 6.9,30.5 4.4,30.5 21.9,30.5 4.4,38.5 4.4,40.5 4.4,42.5 4.4,44.5 6.9,48.5 89.9,14.5
  pour Top (isolate 0.254): 101.8,38.3 101.8,57.5 0,57.5 0,36.9 4,36.9 4,35.4 1.5,35.4 1.5,32.4 0,32.4 0,4 6.8,4 6.8,10.5 18.65,10.5 18.65,8.5 83.15,8.5 83.15,10.5 95,10.5 95,4 101.8,4 101.8,30.8 100.3,30.8 100.3,36.8 97.8,36.8 97.8,38.3
  pour Bottom (isolate 0.254): 101.8,38.3 101.8,57.5 0,57.5 0,36.9 4,36.9 4,35.4 1.5,35.4 1.5,32.4 0,32.4 0,4 6.8,4 6.8,10.5 18.65,10.5 18.65,8.5 83.15,8.5 83.15,10.5 95,10.5 95,4 101.8,4 101.8,30.8 100.3,30.8 100.3,36.8 97.8,36.8 97.8,38.3
JTCK_C
  Top 0.127: J1.44 35.9,11.2 38.1,13.4 43.6,13.4 45.4,15.2 RN2.1
LED  (via drill 0.35)
  Top 0.127: U1.17 50.15,34.25 v49.9,34.5 | v45.4,38.5 R12.2
  Bottom 0.127: v49.9,34.5 46.6,34.5 45.4,35.7 v45.4,38.5
N$2  (via drill 0.35)
  Top 0.127: v21.9,35.3 21.17,35.3 U9.48 | v9.6,35.3 8.55,35.3 S1.3
  Bottom 0.127: v21.9,35.3 v9.6,35.3
N$4
  Top 0.127: R12.1 45.5,35.65 LD1.A
N$16
  Top 0.127: RN10.1 33.58,46.8 33.8,47.02 U6.4 36.08,47.02 36.55,46.55 R1.1
PMOD_1
  Top 0.127: U1.138 56.65,45.25 55.4,46.5 47.35,46.5 47.15,46.7 R3.1 47.15,48.4 45.9,49.65 45.9,54.82 J4.12
PMOD_2
  Top 0.127: U1.140 55.65,45.25 54.7,46.2 46.2,46.2 45.6,46.8 45.6,50.58 44.75,51.43 J4.11
PMOD_3
  Top 0.127: J4.10 43.5,54.68 43.5,52.28 45.3,50.48 45.3,46.7 46.1,45.9 54.5,45.9 55.15,45.25 U1.141
PMOD_4
  Top 0.127: U1.6 49.25,39.75 45.01,43.99 45.01,50.33 42.21,53.13 J4.9
PMOD_5
  Top 0.127: U1.7 49.35,39.25 44.7,43.9 44.7,50.2 42.8,52.1 41.54,52.1 40.95,52.69 40.95,54.69 J4.8
PMOD_6
  Top 0.127: U1.8 49.45,38.75 44.4,43.8 44.4,50.1 42.7,51.8 41.3,51.8 J4.7
PMOD_7
  Top 0.127: U1.10 50.05,37.75 44.1,43.7 44.1,50 42.6,51.5 39.5,51.5 38.4,52.6 38.4,54.7 J4.6
PMOD_8
  Top 0.127: U1.11 50.15,37.25 43.83,43.57 43.83,49.87 42.5,51.2 39.36,51.2 J4.5
RTC_SCL
  Top 0.127: U1.21 50.05,32.25 48.8,33.5 43.8,33.5 42.8,34.5 42.8,36.7 42.33,37.17 41.25,37.17 | 41.25,37.17 U8.6 | R11.1 41.25,37.17
RTC_SDA
  Top 0.127: U8.5 41.25,36.52 | U1.22 50.15,31.75 48.7,33.2 43.7,33.2 42.5,34.4 42.5,36.1 42.08,36.52 41.25,36.52 | R10.1 41.25,36.52
RTC_VBAT
  Top 0.127: G1.+ 25.2,20.5 25.7,21 25.7,24.2 28.09,26.6 28.09,33.1 29,34 31.9,34 33,35.1 33,36.9 32.72,37.17 U8.3
RTC_X1
  Top 0.127: U8.1 31.22,38.48 30.7,39 X2.2 29.9,40.25 C20.1
RTC_X2
  Top 0.127: U8.2 31.22,37.83 30.7,37.3 X2.1 29.9,35.45 C21.1
SD_CLK  (via drill 0.35)
  Top 0.127: U1.114 68.65,46.65 72,50 81.4,50 83.4,48 v85.6,48 100.7,48 100.89,47.8 J2.5 | v80.8,51.9 RN9.2
  Bottom 0.127: v85.6,48 85.6,48.8 84,50.4 82.3,50.4 v80.8,51.9
SD_CMD  (via drill 0.35)
  Top 0.127: U1.118 66.65,45.15 71.8,50.3 81.7,50.3 83.3,48.7 v84.6,48.7 92.2,48.7 93.5,50.01 J2.3 | v80,52.8 RN9.1
  Bottom 0.127: v84.6,48.7 84.6,49.4 83.9,50.1 81.7,50.1 80,51.8 v80,52.8
SD_DAT0  (via drill 0.35)
  Top 0.127: U1.113 69.15,46.65 72.2,49.7 81.1,49.7 83.5,47.3 v86.6,47.3 92.2,47.3 93.89,45.6 J2.7 | v81.6,52.8 RN9.3
  Bottom 0.127: v81.6,52.8 81.6,51.8 82.7,50.7 84.1,50.7 86.6,48.2 v86.6,47.3
SD_DAT1  (via drill 0.35)
  Top 0.127: U1.112 69.65,46.65 72.4,49.4 80.8,49.4 83.6,46.6 v87.6,46.6 92.2,46.6 94.25,44.55 J2.8 | v82.4,51.9 RN9.4
  Bottom 0.127: v82.4,51.9 83.3,51.9 87.6,47.6 v87.6,46.6
SD_DAT2
  Top 0.127: U1.120 65.65,45.15 71.4,50.9 77.6,50.9 | 77.6,50.9 82.3,50.9 83.1,50.1 92.2,50.1 94.31,52.2 J2.1 | 77.6,50.9 RN8.3
SD_DAT3  (via drill 0.35)
  Top 0.127: U1.119 66.15,45.15 71.6,50.6 82,50.6 83.2,49.4 v83.6,49.4 92.2,49.4 93.91,51.1 J2.2 | v78.4,52.8 RN8.4
  Bottom 0.127: v83.6,49.4 81.8,49.4 v78.4,52.8
SI_CLK  (via drill 0.35)
  Top 0.127: U1.28 50.75,28.75 48.5,26.5 48.5,21.1 46.2,18.8 v46.2,18.5 RN2.7 | v38.1,17.5 36.5,17.5 36.08,17.07 U3.2
  Bottom 0.127: v46.2,18.5 45.2,17.5 v38.1,17.5
SI_CLK_C  (via drill 0.35)
  Top 0.127: v36.9,9.5 36.9,11.2 38.8,13.1 44.1,13.1 46.2,15.2 RN2.2
  Bottom 0.127: v36.9,9.5 35.9,8.5 J1.19
SI_DATA
  Top 0.127: U1.24 43.75,30.75 41.4,28.4 RN1.8
SI_DATA_C  (via drill 0.35)
  Top 0.127: v31.9,9.5 31.9,11.2 35,14.3 40.5,14.3 41.4,15.2 RN1.1
  Bottom 0.127: J1.21 30.9,8.5 v31.9,9.5
SRAM_CLK
  Top 0.127: U1.122 64.65,45.15 65.5,46 65.5,49.5 66.86,50.87 U5.6
SRAM_SIO0
  Top 0.127: U1.121 65.15,45.15 65.9,45.9 65.9,48.6 66.89,49.59 U5.5
SRAM_SIO1
  Top 0.127: U1.126 62.65,47.15 64.3,48.8 64.3,50.8 62.96,52.13 U5.2
SRAM_SIO2
  Top 0.127: U1.127 62.15,47.25 63.9,49 63.9,49.9 62.94,50.87 U5.3
SRAM_SIO3
  Top 0.127: U1.123 64.15,45.15 65.1,46.1 65.1,50.4 66.83,52.13 U5.7 69.13,52.13 69.8,52.8 76.4,52.8 76.8,53.2 RN8.2

## Text on the board
tNames: N64 FlashCart/DevKit | SummerCart64
bNames: N64 FlashCart/DevKit | HW version: 1.0a / Designed by Polprzewodnikowy | SummerCart64